# Altium PCB R1250GSA Foglamp Swith.PcbDoc
Units mm, origin at the board's own origin, x right, y up, seen from the top; angles counter-clockwise.
Board outline 66.99 x 39 mm, 2 copper layers (Top Layer, Bottom Layer); 27 components, 20 nets, 67 pads, 11 vias.
Unrouted connection lines stored in the file: 1.
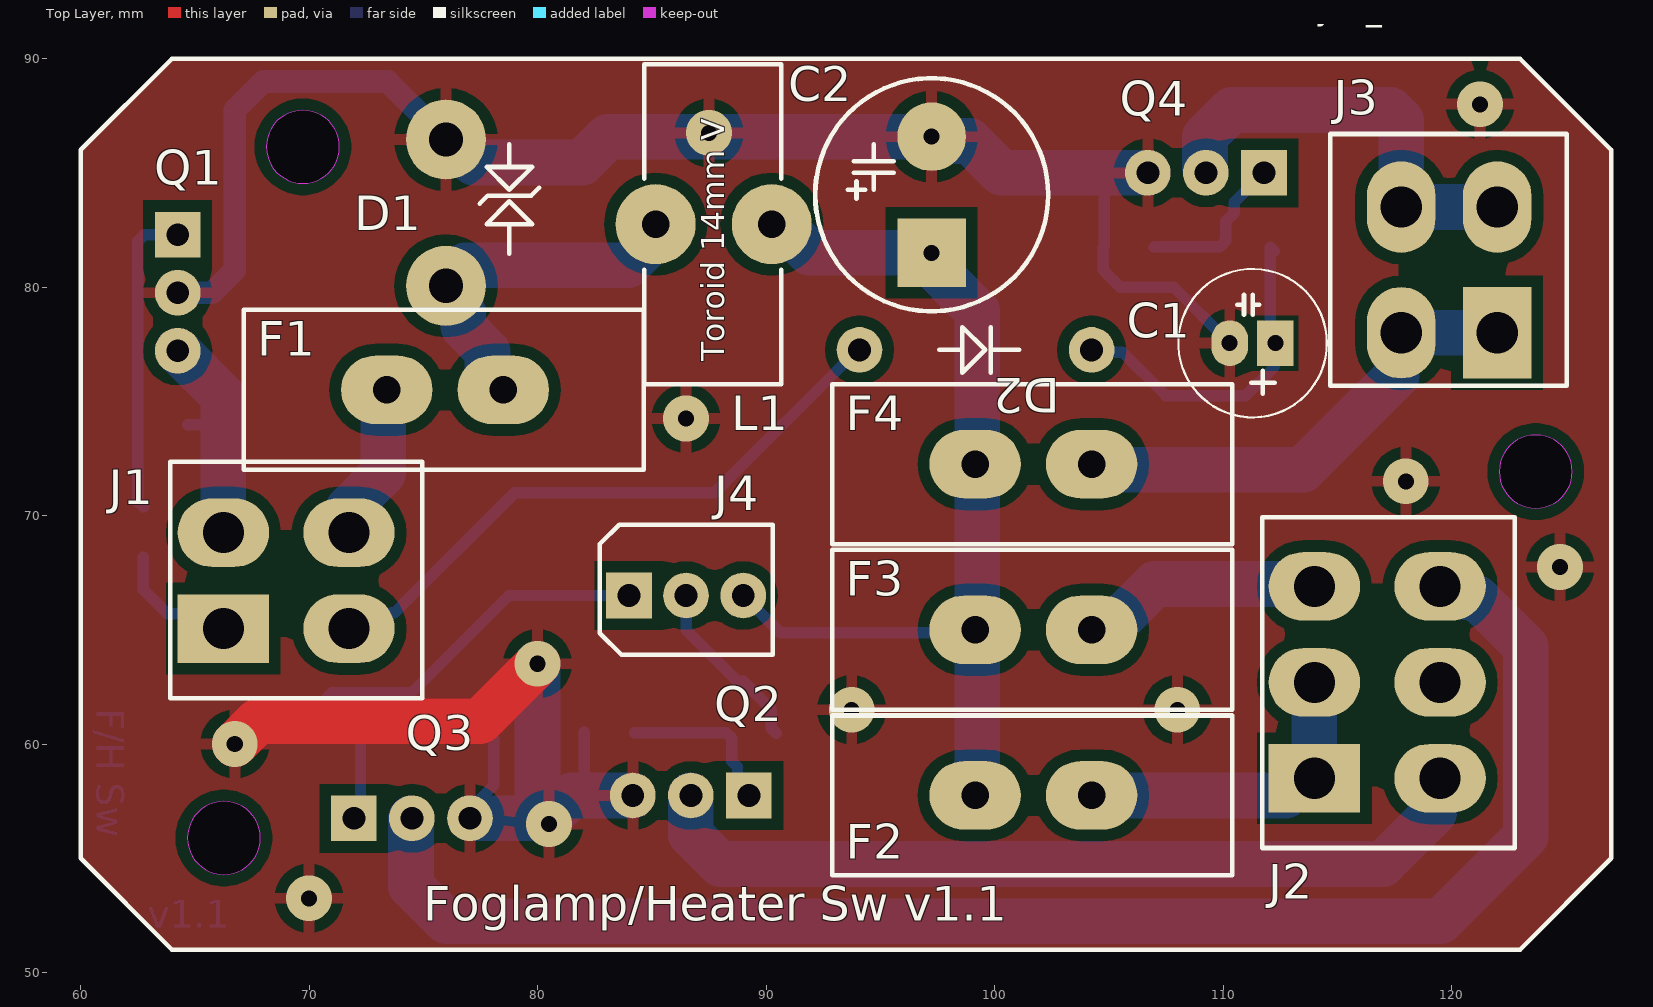
[diagram p0: Top Layer view]
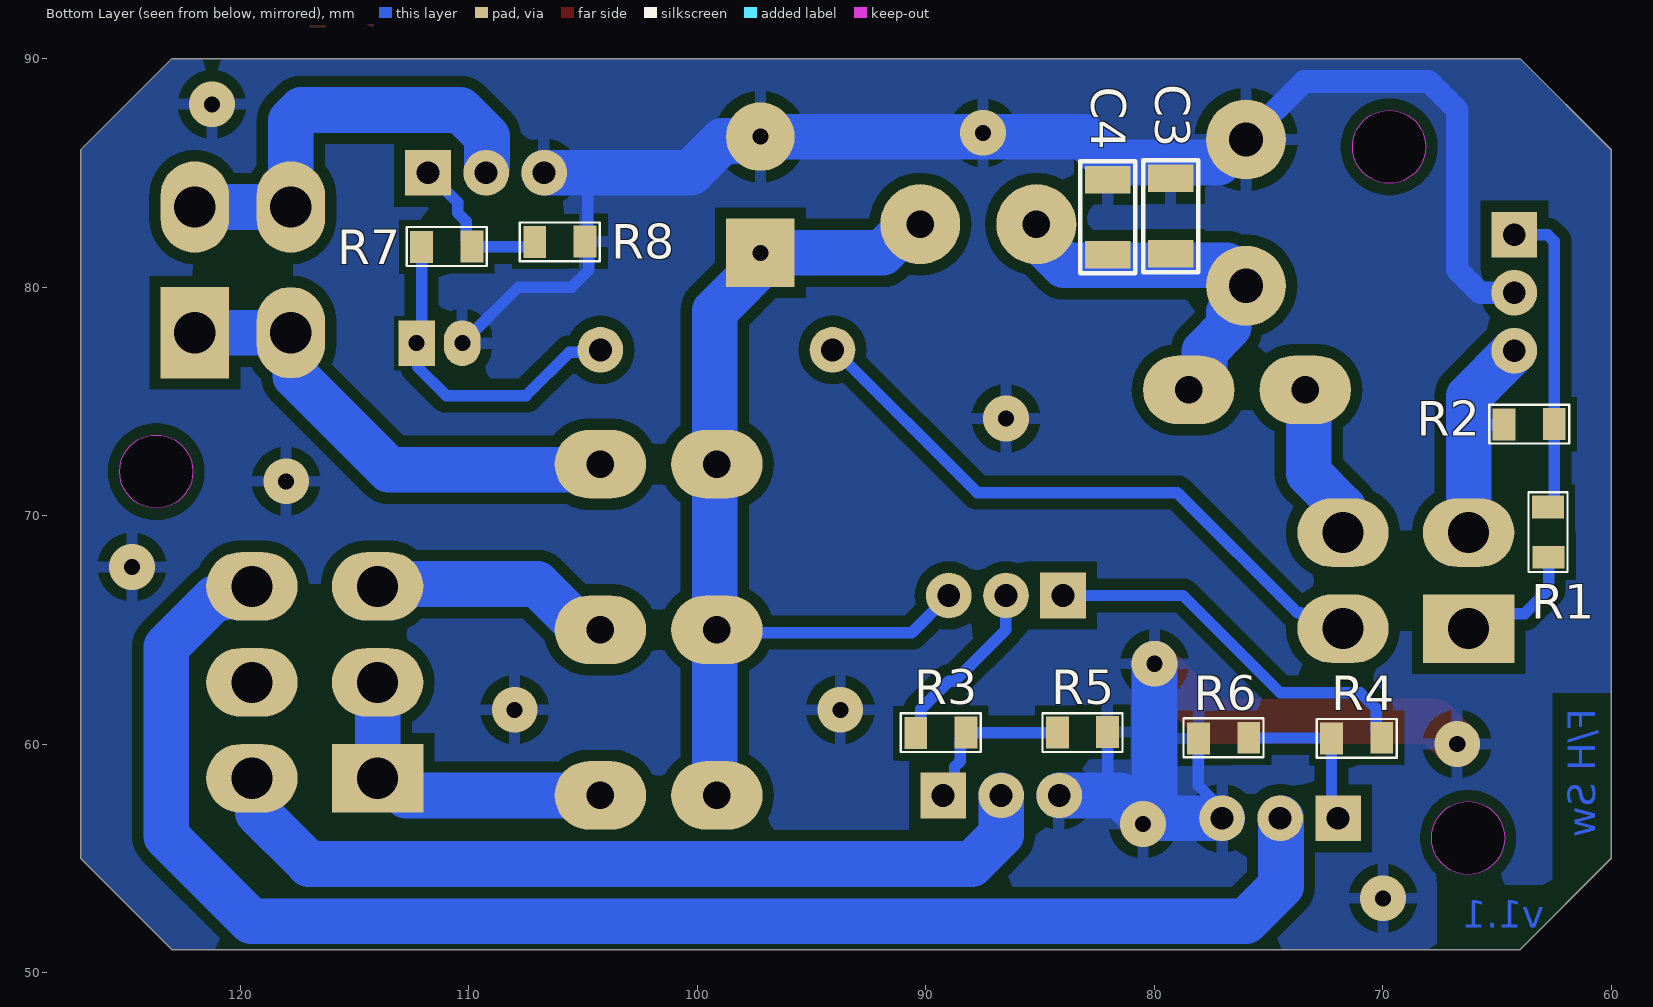
[diagram p1: Bottom Layer view, seen from below]
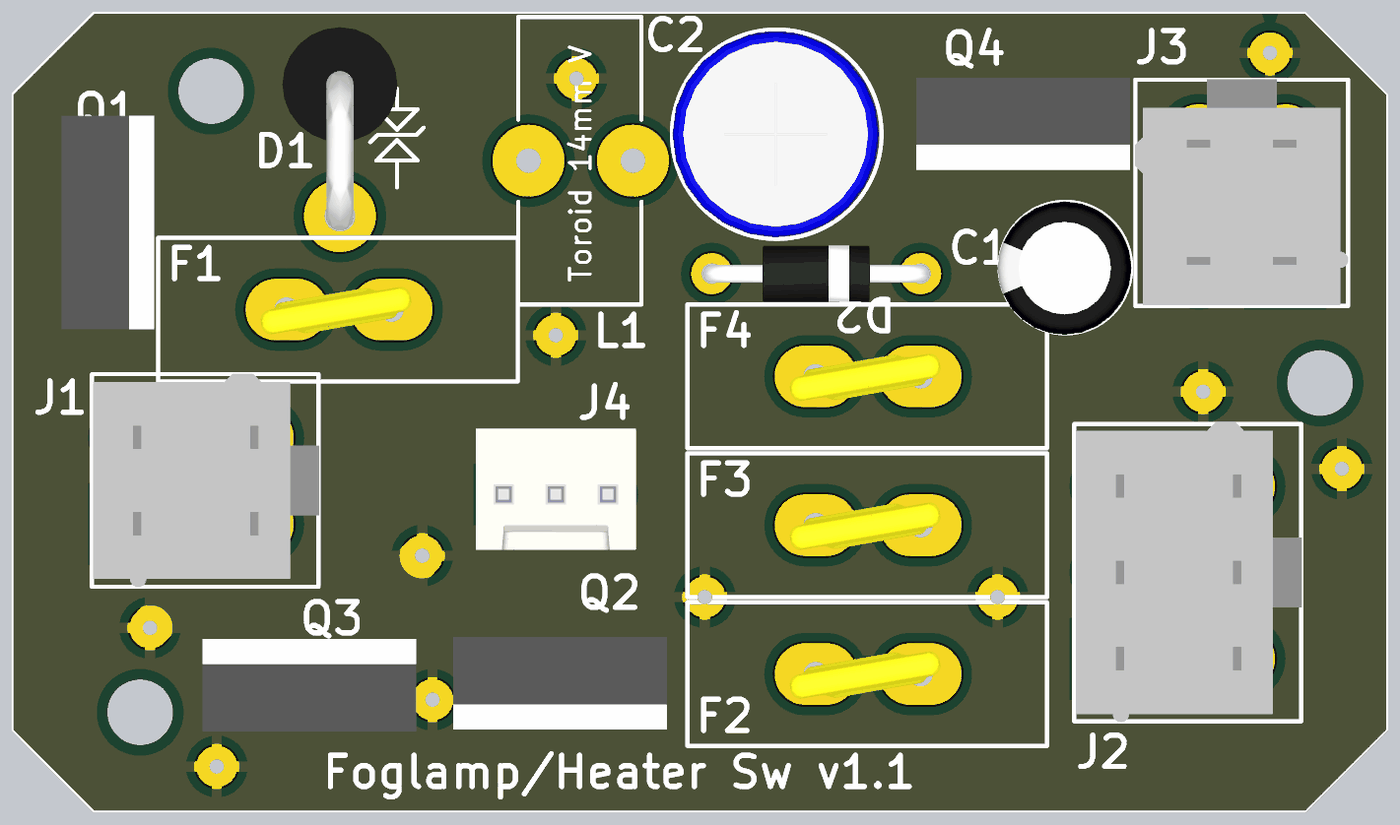
[diagram p2: 3D render of the assembled board from above, using the file's embedded part models]
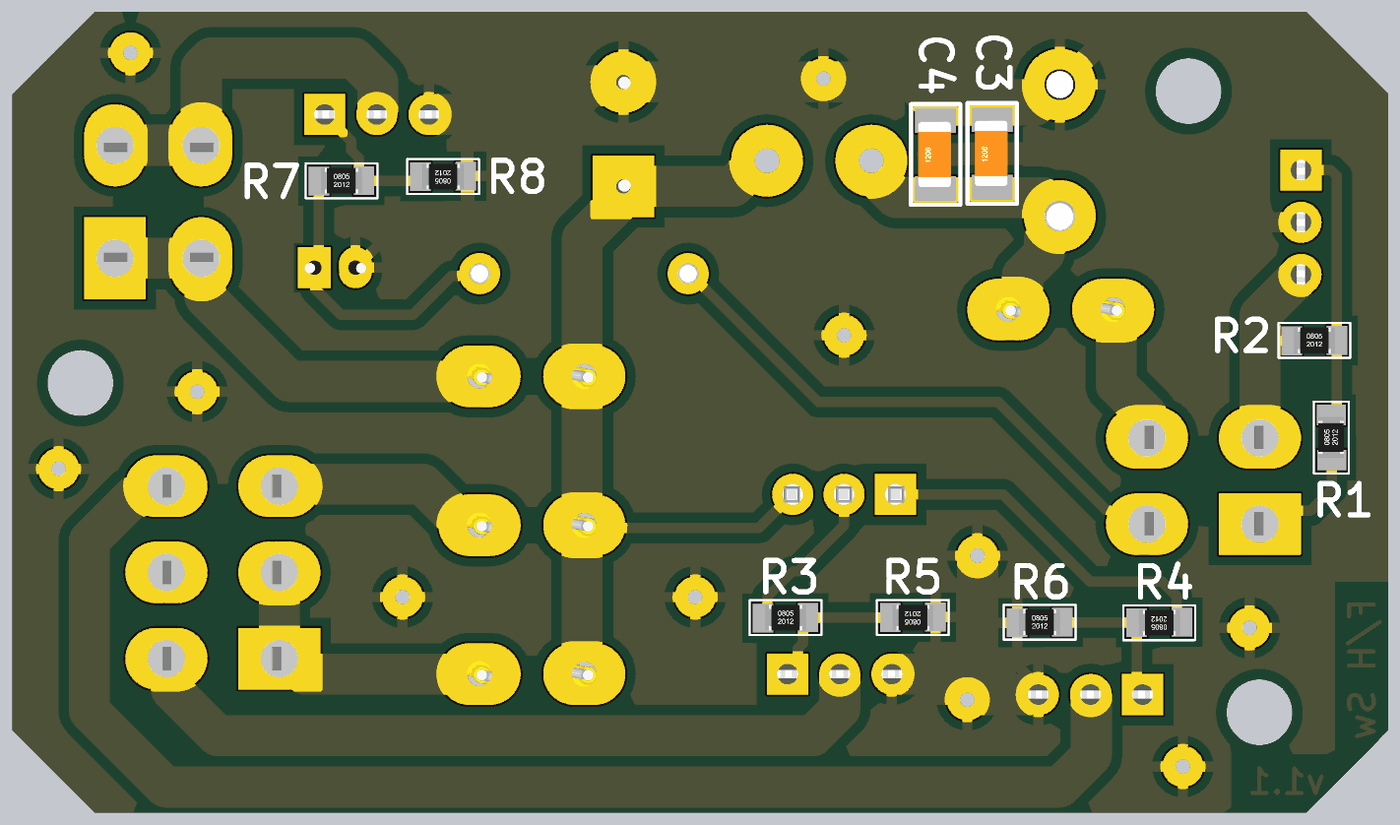
[diagram p3: 3D render of the assembled board from below, using the file's embedded part models]

## Layer stack, top to bottom
Top Solder: solder mask 0.0102, Solder Resist, Dk 3.5
Top Layer: signal copper 0.0356
Dielectric 1: dielectric 0.32, FR-4, Dk 4.8
Bottom Layer: signal copper 0.0356
Bottom Solder: solder mask 0.0102, Solder Resist, Dk 3.5

## Board outline
60.006,55 60.006,86 60.006,86.006 64,90 123,89.998 123,90 127,86 127,55 123,51 64,51
cut-out: 122.088,71.922 ccw(c123.688,71.922) 123.688,70.322 ccw(c123.688,71.922) 125.288,71.922 ccw(c123.688,71.922) 123.688,73.522 ccw(c123.688,71.922)
cut-out: 68.128,86.138 ccw(c69.728,86.138) 69.728,84.538 ccw(c69.728,86.138) 71.328,86.138 ccw(c69.728,86.138) 69.728,87.738 ccw(c69.728,86.138)
cut-out: 64.672,55.888 ccw(c66.272,55.888) 66.272,54.288 ccw(c66.272,55.888) 67.872,55.888 ccw(c66.272,55.888) 66.272,57.488 ccw(c66.272,55.888)

## Design rules (kind name [scope] priority, off if disabled: settings)
Clearance Clearance_1 [InComponent('C1')] p1: gap=0.2 ignorepadtopadclearanceinfootprint=FALSE
Clearance [All] p2: gap=0.5 ignorepadtopadclearanceinfootprint=FALSE
ComponentClearance [All] p1: gap=0.01 collisioncheckmode=3 verticalgap=0.2 showdistances=FALSE
Height [All] p1: minheight=0 maxheight=25 prefheight=12.7
HoleSize [All] p1: absolutevalues=TRUE maxlimit=3.2 minlimit=0.4 maxpercent=80.000 minpercent=20.000
HoleToHoleClearance [All] p1: gap=0.2 allowstackedmicrovias=TRUE
PlaneClearance [All] p1: clearance=1
PlaneConnect [All] p1: planeconnectstyle=Relief reliefexpansion=0.508 reliefentries=4 reliefconductorwidth=0.5 reliefairgap=0.5
PolygonConnect [All] p1: connectstyle=Relief reliefconductorwidth=0.5 reliefentries=4 polygonreliefangle="90 Angle" airgapwidth=0.5
RoutingVias [All] p1: holewidth=0.7 width=1.5 viastyle="Through Hole" minholewidth=0.4 minwidth=0.4 maxholewidth=3.2 maxwidth=7
SilkToSilkClearance [All] p1: silktosilkclearance=0.05
SilkToSolderMaskClearance [IsPad] p1: minsilkscreentomaskgap=0.2 clearancetoexposedcopper=TRUE
SolderMaskExpansion [All] p1: expansion=0.1 istentingtop=FALSE
Width [All] p1: maxlimit=3 minlimit=0.2 preferedwidth=0.5
22 further rules are at their usual default settings.

## Components (designator, comment, footprint, x,y, rotation, side; value= is the part's Value field where it differs from the comment)
C1 "47uF 25V" "Cap E p2mm D6.5xH11" 112.294,77.544 r180 top
C2 "25V 1000uF" "Cap E p5.08mm D10.2mm (3p)" 97.25,81.5 r90 top
C3 "10nF" "SMD 1206 (3216)" 79.29,81.455 r90 bottom
C4 "100nF" "SMD 1206 (3216)" 82.04,81.405 r90 bottom
D1 "1.5KE20CA" "TVS diode DO-201 V" 75.993,86.455 r270 top
D2 "Shotki N5819" "Diode DO-41" 94.09,77.25 r0 top value=1N5822
F1 "A" "Fuse RGE1100" 73.4,75.5 r90 top
F2 "5A" "Fuse RGE1100" 99.15,57.75 r90 top
F3 "5A" "Fuse RGE1100" 99.15,65 r90 top
F4 "5A" "Fuse RGE1100" 99.15,72.25 r90 top
J1 "connector" "Molex Mini-Fit Jr - 4Pin V" 66.25,69.25 r0 top
J2 "connector" "Molex Mini-Fit Jr - 6Pin V" 114,66.9 r0 top
J3 "connector" "Molex Mini-Fit Jr - 4Pin V" 117.8,78 r90 top
J4 "Handlebar Switch" WF-3 84,66.5 r90 top
L1 "Inductor V" "Toroid V D14-W6" 85.17,82.75 r0 top value=700uH
Q1 "IRF3205 PBf" TO220-2 64.25,82.29 r180 top
Q2 "IRF3205 PBf" TO220-2 89.25,57.75 r90 top
Q3 "IRF3205 PBf" TO220-2 71.96,56.75 r270 top
Q4 "IRF3205 PBf" TO220-2 111.79,85 r90 top
R1 "1 kOm" "SMD 0805 (2012)" 62.75,68.25 r90 bottom
R2 "10k Om" "SMD 0805 (2012)" 64.625,73.975 r180 bottom
R3 "1 kOm" "SMD 0805 (2012)" 90.375,60.475 r180 bottom
R4 "1 kOm" "SMD 0805 (2012)" 70.125,60.275 r0 bottom
R5 "10k Om" "SMD 0805 (2012)" 82.125,60.525 r0 bottom
R6 "10k Om" "SMD 0805 (2012)" 78,60.25 r180 bottom
R7 "1 kOm" "SMD 0805 (2012)" 112,81.75 r180 bottom
R8 "20k Om" "SMD 0805 (2012)" 105,82 r0 bottom

## Footprints (in the part's own frame and the unit in brackets; to place one, negate y for a bottom-side part, rotate by r counter-clockwise, add the part's x,y. Pads: shape width x height; smd on the part's side, far side on the other; paste and mask are expansions set on the pad)
"Cap E p2mm D6.5xH11" [mm] "D 6.5mm; H 11mm"
  rect 1.6x2 hole 0.7: 1(0,0)
  oval 1.6x2 hole 0.7: 2(2,0)
  silkscreen extent -2.25,-3.25 4.25,3.25, body extent -2.22,-3.22 4.27,3.28, height 11.49
"Cap E p5.08mm D10.2mm (3p)" [mm] "D 10.2mm; H 17.5mm, Hole: 0.7mm"
  rect 3x3 hole 0.7: 1(0,0)
  round 3 hole 0.7: 2(5.08,0)
  silkscreen extent -2.56,-5.1 7.64,5.1, body extent -2.49,-4.97 7.57,5.08, height 16.53
"Diode DO-41" [mm] "p10.16mm"
  round 2 hole 1: A(0,0) K(10.16,0)
  silkscreen extent 3.5,-1 7,1, body extent -0.43,-1.37 10.59,1.37, height 2.73
"Fuse RGE1100" [mm] "Resettable 11A"
  oval 3x4 hole 1.2: 1(0,0) 2(0,-5.1)
  silkscreen extent -3.5,-11.25 3.5,6.25, body extent -1.53,-6.19 1.43,1.39, height 15
"Molex Mini-Fit Jr - 4Pin V" [mm] "Molex Mega-Fit"
  rect 4x3 hole 1.8: 1(0,-4.2)
  oval 4x3 hole 1.8: 2(0,0) 3(5.5,-4.2) 4(5.5,0)
  silkscreen extent -2.32,-7.25 8.7,3.1, body extent -2.27,-7.27 8.73,3.12, height 12.8
"Molex Mini-Fit Jr - 6Pin V" [mm] "Molex Mega-Fit"
  rect 4x3 hole 1.8: 1(0,-8.4)
  oval 4x3 hole 1.8: 2(0,-4.2) 3(0,0) 4(5.5,-8.4) 5(5.5,-4.2) 6(5.5,0)
  silkscreen extent -2.27,-11.45 8.77,3.03, body extent -2.2,-11.5 8.8,3.1, height 12.8
"SMD 0805 (2012)" [mm]
  rect 1x1.4 smd: 1(-0.075,0) 2(2.125,0.025)
  silkscreen extent -0.72,-0.82 2.78,0.87, body extent 0.03,-0.6 2.03,0.65, height 0.45
"SMD 1206 (3216)" [mm]
  rect 1.2x2 smd: 1(0,0) 2(3.3,0)
  silkscreen extent -0.8,-1.2 4.1,1.2, body extent 0.05,-0.75 3.25,0.85, height 1
TO220-2 [mm]
  rect 2x2 hole 1: 1(0,0)
  round 2 hole 1: 2(0,2.54) 3(0,5.08)
  body extent -2.7,-2.65 1.8,7.75, height 19
"Toroid V D14-W6" [mm] "10mm Black ring TEC.ORG"
  round 3.5 hole 1.2: 1(0,0) 2(5.08,0)
  silkscreen extent -0.5,-7 5.5,7
"TVS diode DO-201 V" [mm] "6p, p15.24mm"
  round 3.5 hole 1.5: 1(0,0) 2(6.4,0)
  silkscreen extent 0.2,1.47 5,4.07, body extent -2.8,-2.8 7.09,2.8, height 15.69
WF-3 [mm]
  rect 2x2 hole 1: 1(0,0)
  round 2 hole 1: 2(0,-2.5) 3(0,-5)
  silkscreen extent -2.6,-6.3 3.1,1.27, body extent -2.7,-6.4 3.2,1.4, height 11.73

## Part data
C1: library part "Cap Elecrolitic", "Capacitor"
C2: library part "Cap E 1000mF x 25V", "Capacitor"
C3 C4: library part "Cap Ceramic SMD (All)", "Capacitor"
D1: library part "TVS 1.5KE20CA", "1500W Transil (TVS Diode)", Pulse Power=1500W, Breakdown V="min 19 max 21", Load A=5, PackageReference=DO-201, Stand-Off V=17.1
D2: library part "D Shotki All", "Shotki  Diode", PackageReference=DO-201
F1 F2 F3 F4: library part Fuse, "Round fuse"
J1 J3: library part "Molex Mini-Fit Jr - 4 pin", "Right, Dbl line, Female"
J2: library part "Molex Mini-Fit Jr - 6 pin", "Right, Dbl line, Female"
J4: library part WF-3, "Standart Fan MB's Connector"
L1: "Inductor Vertical", Code_IEC=1005, Code_JEITA=0402, LatestRevisionDate=29-May-2009, LatestRevisionNote="IPC-7351 Footprint Added.", PackageDescription="Chip Inductor", PackageReference=0402-A, Published=8-Jun-2000, Publisher="Altium Limited"
Q1 Q2 Q3 Q4: library part IRF3205, "N-Channel 55V - 0.008Ω - 110A", I d - Drain current (continuous) at TC = 25°C="110 A", I d - Drain current (continuous) at TC = 100°C="80 A", C ISS Входная емкость="3247 pF", C OSS Выходная емкость="781 pF", DataSheet=http://tec.org.ru/_bd/2/223_IRF3205.pdf, Monufacturer=IOR, Name="IRF3205 PBf", RDS Сопротивление Сток-Исток="0.008 Om", URL=http://tec.org.ru/board/49-1-0-223, V DSS (v)=55V, VGS Макс напр на гейте="+-20 V", VGS Порог Открытия="+2....+4 V"
R1 R2 R3 R4 R5 R6 R7 R8: library part "Res All Types"

## Via types
v1: diameter 2, hole 0.7, Top Layer to Bottom Layer, 9 vias
v2: diameter 2, hole 0.711, Top Layer to Bottom Layer, 2 vias

## Nets (pads, with @x,y where several pads share a name; then routed paths per layer and width w, separated by ;. In a path a pad name is that pad's centre, name@x,y a point inside that pad or via, vN(x,y) a via of type N, cw(c..) or ccw(c..) an arc to the next point about the centre after c; other vN are vias at no path point)
"+12 Fog Bottom": F2.2 J2.1 J2.2 | length 13.1
  Bottom Layer w2: F2.2 112.75,57.75 113.5,58.5 J2.1 J2.2@114,61.5
"+12 Fog Up": F3.2 J2.3 | length 10
  Bottom Layer w2: F3.2 105.021,65 107.021,67 J2.3@113.454,67
"+12 V RAW": C3.1 C4.1 D1.2 F1.2 L1.1 | length 16
  Bottom Layer w2: F1.2 78.271,75.5 77.809,75.962 77.809,77.191 76.743,78.257 76.743,78.899 75.946,79.696 75.946,80.055 76.846,80.955 79.29,80.955 82.04,80.955 83.955,80.955 L1.1@85.25,82.25
+12V: F1.1 J1.4 | length 7.1
  Bottom Layer w2: J1.4 71.75,70.35 73.25,71.85 F1.1@73.25,75.75
"+12V No Noise": C2.1 F2.1 F3.1 F4.1 J4.3 L1.2 | length 42.9
  Bottom Layer w0.5: J4.3 90.625,64.875 99.025,64.875 F3.1
  Bottom Layer w2: L1.2 90.656,82.75 91.906,81.5 C2.1@96.7,81.5 ; C2.1 C2.1@96.7,81.5 ; F2.1@99.25,58 99.25,78.95 C2.1@96.7,81.5
GND: C1.2 C2.2 C3.2 C4.2 D1.1 Q1.2 Q2.3 Q3.3 Q4.3 R5.1 R6.1 R8.1 | length 100.4
  Top Layer w2: v2(66.75,60) 67.75,61 77.487,61 v2(80,63.513)
  Bottom Layer w0.5: Q3.3 77.04,57.155 78.075,58.19 R6.1 ; 81.5,57.75 82.05,58.3 R5.1 ; 104.75,85 104.8,84.95 104.8,81.775 104.75,81.725 104.75,80.75 105.5,80 107.838,80 C1.2
  Bottom Layer w1: Q1.2 65.75,79.75 66.75,80.75 66.75,87.75 68,89 73.448,89 D1.1
  Bottom Layer w2: D1.1@76.196,86.455 77.196,85.455 81.955,85.455 83.08,86.58 C2.2@96.7,86.58 ; Q3.3 v1@80,56.75 ; v2(80,63.513) v1@80,56.75 ; Q2.3 81.5,57.75 80.5,56.75 v1@80,56.75 ; C2.2 C2.2@96.7,86.58 ; Q4.3 104.75,85 100.3,85 98.911,86.389 96.891,86.389 C2.2@96.7,86.58
  other v1: 70,53.25 80.5,56.5 93.75,61.5 108,61.5 124.75,67.75 118,71.5 86.5,74.25 87.5,86.75 121.25,88
"GND Fog Bottom": J2.4 J2.5 Q2.2 | length 36
  Bottom Layer w2: Q2.2 86.71,56.04 88,54.75 117,54.75 119.25,57 J2.4@119.25,57.25
"GND Fog Up": J2.6 Q3.2 | length 66.7
  Bottom Layer w2: Q3.2@74.46,56.75 74.46,53.79 76,52.25 119.536,52.25 123.25,55.964 123.25,64.25 121.1,66.4 120.771,66.4 120.421,66.75 J2.6@119.768,66.75
"GND Heater": J3.3 J3.4 Q4.2 | length 18.6
  Bottom Layer w2: Q4.2@109.21,85.25 109.21,86.578 110.382,87.75 117.328,87.75 117.8,87.278 J3.4 J3.3
"GND In": J1.2 Q1.3 R2.1 | length 10.3
  Bottom Layer w0.5: R2.1 66.225,73.975 66.25,74
  Bottom Layer w2: Q1.3 66.25,75.21 66.25,74 J1.2
"Heater IN": D2.A J1.3 | length 27.3
  Bottom Layer w0.5: J1.3 72.926,65.05 73.617,65.741 73.741,65.741 79,71 87.75,71 D2.A@94,77.25
NetC1_1: C1.1 D2.K R7.1 | length 13.9
  Bottom Layer w0.5: D2.K 104.362,77.138 105.612,77.138 107.5,75.25 111,75.25 112.25,76.5 ; R7.1@112.25,81.575 R7.1 112.075,77.763 C1.1
NetF4_2: F4.2 J3.1 J3.2 | length 21.3
  Bottom Layer w2: F4.2 104.441,72.059 105.648,72.059 105.707,72 113.5,72 117.609,76.109 117.609,77.809 J3.2 J3.1
NetQ1_1: Q1.1 R1.2 R2.2 | length 13.6
  Bottom Layer w0.5: R1.2 62.75,70.375 62.5,70.625 R2.2 62.5,81.997 62.793,82.29 Q1.1
NetQ2_1: Q2.1 R3.2 R5.2 | length 7.2
  Bottom Layer w0.5: R5.2 R3.2 88.5,60.25 88.5,59.25 88.75,59 88.75,58.25 Q2.1
NetQ3_1: Q3.1 R4.2 R6.2 | length 7.3
  Bottom Layer w0.5: Q3.1 72.25,57.04 R4.2 72.263,60.263 75.863,60.263 R6.2
NetQ4_1: Q4.1 R7.2 R8.2 | length 6.9
  Bottom Layer w0.5: R8.2@107,81.75 107.012,81.762 109.862,81.762 R7.2 110.125,82.025 110.125,82.875 110.5,83.25 110.5,83.71 Q4.1
"ON Ingition": J1.1 R1.1 | length 5.6
  Bottom Layer w0.5: R1.1 62.75,66.75 63.793,65.707 65.593,65.707 J1.1
"Sw Fog Bottom": J4.2 R3.1 | length 7.8
  Bottom Layer w0.5: J4.2 86.5,65 88.75,62.75 89,62.75 90.232,61.518 90.232,60.693 R3.1
"Sw Fog Up": J4.1 R4.1 | length 17.1
  Bottom Layer w0.5: R4.1 70.3,60.525 70.3,61.55 71,62.25 74.5,62.25 78.75,66.5 J4.1

## Polygon pours and split planes (outlines as drawn)
GND on Bottom Layer "GND_L02_P001" (solid, pour order 1): 64,51 60,55 60,86 64,90 123,90 127,86 127,55 123,51
no net on Bottom Layer "NONET_L02_P000" (solid, pour order 0): 65,52
GND on Top Layer "GND_L01_P002" (solid, pour order 2): 60,86 64,90 123,90 127,86 127,55 123,51 64,51 60,55

## Other copper
Top Layer:
  text ".Layer_Name" at 111.975,91.7 h1
Bottom Layer:
  text ".Layer_Name" at 75,92 h1
  text "F/H Sw" at 60.7,61.55 h1.2 r270
  text "v1.1" at 62.95,51.95 h1.2

## Silkscreen, mask and mechanical layers (free items; w line width, h text height)
Top Overlay:
  the board outline again, w0.2
  text ".Layer_Name" at 111.975,91.7 h1
  text "Foglamp/Heater Sw v1.1" at 75.004,52.262 h1.52
Bottom Overlay:
  text ".Layer_Name" at 75,92 h1
Top Solder:
  text ".Layer_Name" at 111.975,91.7 h1
Bottom Solder:
  text ".Layer_Name" at 75,92 h1
Mechanical 2:
  text "67 x 39 mm" at 61,95.25 h1
  text "G1015 / G1017 Masterkit Case" at 60.975,93.475 h1
  text ".Pcb_File_Name_No_Path" at 60.925,91.425 h1
Mechanical 3:
  text "67 x 39 mm" at 127,95.25 h1
  text "G1015 / G1017 Masterkit Case" at 126.975,93.475 h1
  text ".Pcb_File_Name_No_Path" at 126.925,91.425 h1

## Dimensions
60,51 to 127,51 on Mechanical 3
60,90 to 60,51 on Mechanical 3
60,90 to 60,51 on Mechanical 2
60,51 to 127,51 on Mechanical 2

## Text inside footprints (layer, text, board x,y; h text height)
L1: Top Overlay "Toroid 14mm V" at 88.17,76.75 h1 r90